# Altium PCB pcb_e2_tp1.PcbDoc
Units mm, origin at the board's own origin, x right, y up, seen from the top; angles counter-clockwise.
Board outline 100.08 x 50.04 mm, 2 copper layers (Top Layer, Bottom Layer); 26 components, 16 nets, 67 pads, 0 vias.
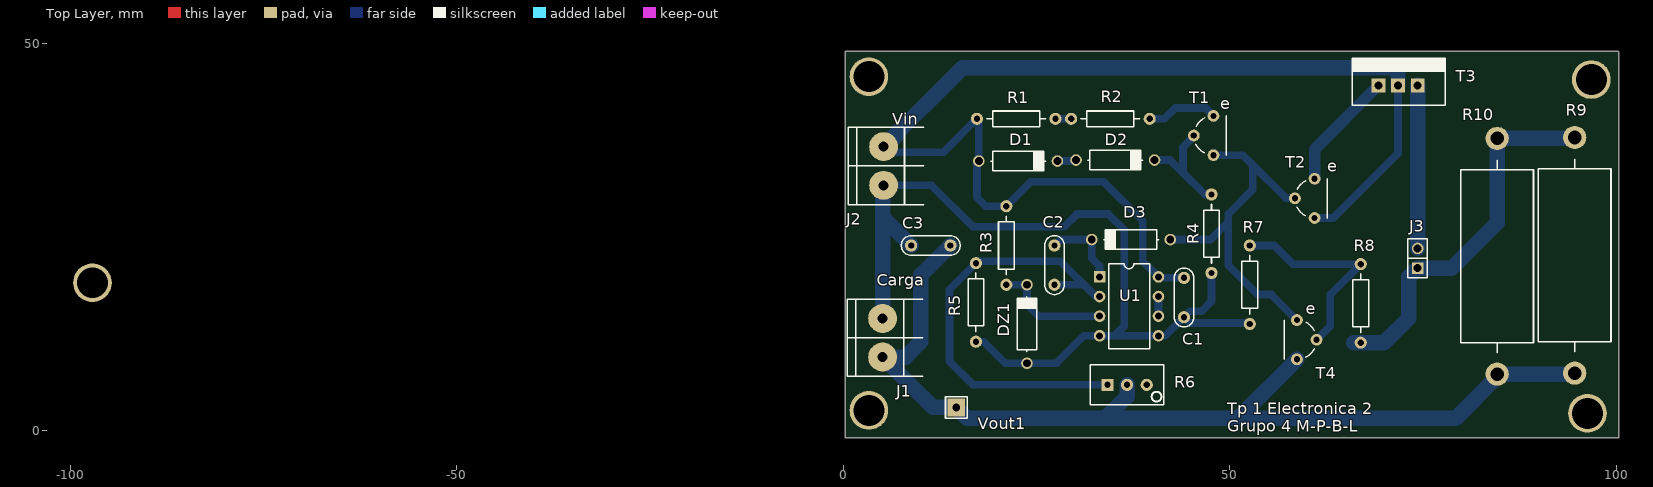
[diagram p0: Top Layer view]
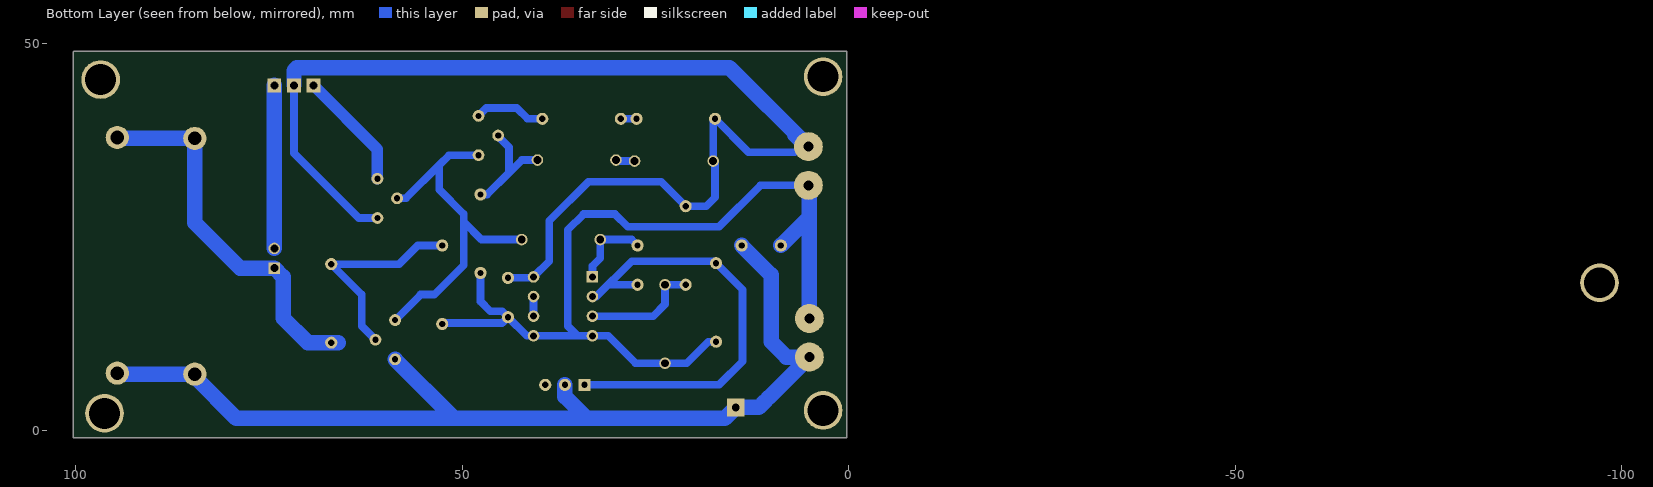
[diagram p1: Bottom Layer view, seen from below]
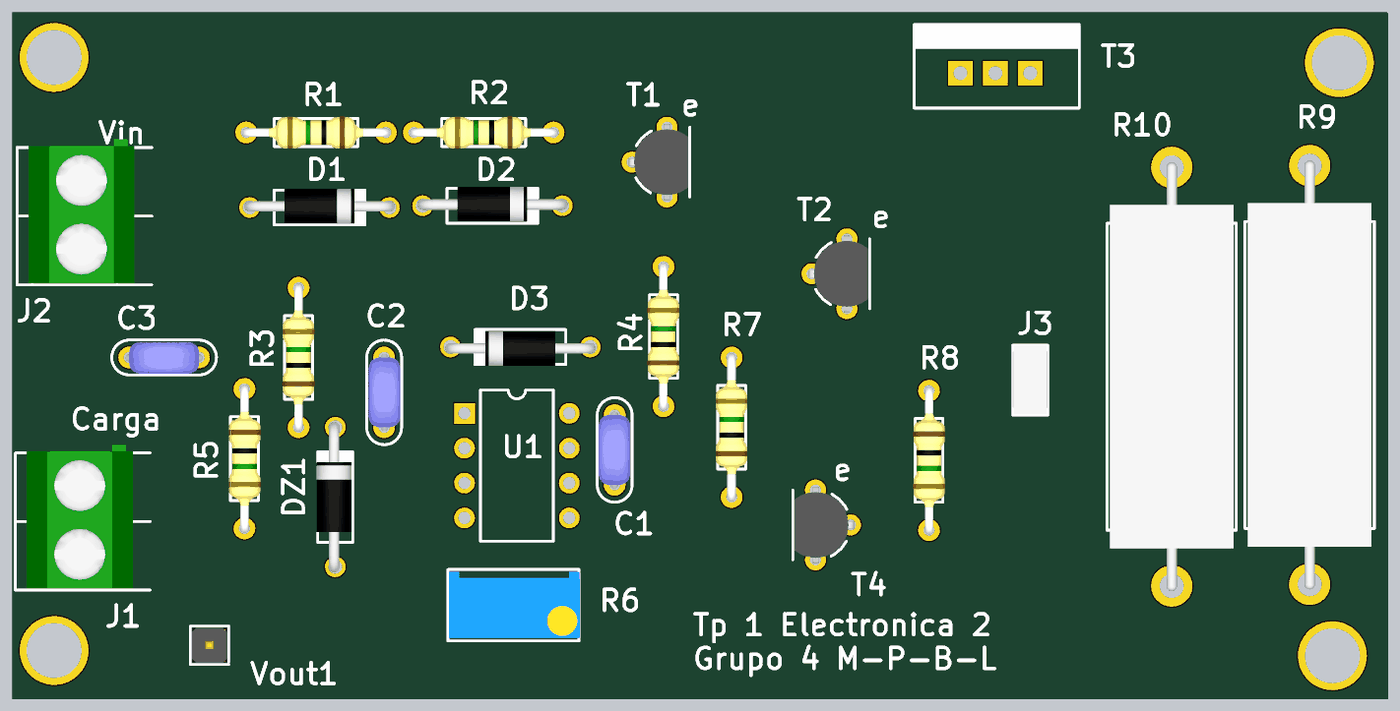
[diagram p2: 3D render of the assembled board from above, using the file's embedded part models]

## Layer stack, top to bottom
Top Solder: solder mask 0.0102, Solder Resist, Dk 3.5
Top Layer: signal copper 0.0356
Dielectric 1: dielectric 0.32, FR-4, Dk 4.8
Bottom Layer: signal copper 0.0356
Bottom Solder: solder mask 0.0102, Solder Resist, Dk 3.5

## Board outline
0.254,-1.016 0.254,49.022 100.216,49.022 100.33,48.908 100.33,-1.016

## Design rules (kind name [scope] priority, off if disabled: settings)
Clearance [All] p1: gap=0.4 ignorepadtopadclearanceinfootprint=FALSE except(0: Arc-Hole Track-Hole SMDPad-Hole THPad-Hole Via-Hole Fill-Hole Poly-Hole Region-Hole Text-Hole)
PolygonConnect [All] p1: connectstyle=Relief reliefconductorwidth=0.254 reliefentries=4 polygonreliefangle="90 Angle" airgapwidth=0.254
RoutingVias [All] p1: holewidth=0.5 width=2 viastyle="Through Hole" minholewidth=0.5 minwidth=1.5 maxholewidth=7 maxwidth=2
SolderMaskExpansion [All] p1: expansion=0.102
Width [All] p1: maxlimit=2 minlimit=1 preferedwidth=1
30 further rules are at their usual default settings.

## Components (designator, comment, footprint, x,y, rotation, side; value= is the part's Value field where it differs from the comment)
C1 "CAP" CAP200 44.069,17.145 r270 top
C2 "CAP" CAP200 27.305,21.336 r90 top
C3 "CAP" CAP200 11.303,23.876 r0 top
D1 "DIODO" DO41 22.606,34.798 r0 top
D2 "DIODO" DO41 35.179,34.925 r0 top
D3 "DIODO" DO41 37.211,24.638 r180 top
DZ1 "DIODO ZENER" DO41 23.749,13.716 r90 top
J1 "Carga" BORNERA2 5.08,11.938 r0 top
J2 "BORNERA 2" BORNERA2 5.207,34.163 r0 top
J3 "M_I" JUMPER2 74.295,22.225 r90 top
R1 "8.2" RES400 27.432,40.259 r180 top
R2 "560" RES400 39.624,40.259 r180 top
R3 "1k" RES400 21.082,18.796 r90 top
R4 "1k" RES400 47.625,20.32 r90 top
R5 "50k" RES400 17.145,21.59 r270 top
R6 "PRESET" "PRESET V" 36.703,5.842 r0 top
R7 "39k" RES400 52.578,13.716 r90 top
R8 "1k" RES400 66.929,21.463 r270 top
R9 "1.2" RES1200 94.615,22.606 r270 top
R10 "1.2" RES1200 84.582,22.479 r270 top
T1 "TRANSISTOR PNP" TO92 46.609,38.1 r270 top
T2 "TRANSISTOR NPN" TO92 59.69,29.972 r270 top
T3 "TRANSISTOR NPN" "TO-220 V" 71.755,44.577 r0 top
T4 "TRANSISTOR NPN" TO92 59.944,11.684 r90 top
U1 "LM358AN" DIP8 36.957,16.002 r270 top
Vout1 "TP" TPTH 14.605,2.921 r90 top

## Footprints (in the part's own frame and the unit in brackets; to place one, negate y for a bottom-side part, rotate by r counter-clockwise, add the part's x,y. Pads: shape width x height; smd on the part's side, far side on the other; paste and mask are expansions set on the pad)
BORNERA2 [mm] "Bornera con Tornillos 5mm separación"
  round 3.75 hole 1.3: 1(0,2.5) 2(0,-2.5)
  silkscreen extent -4.6,-5 5.2,5, body extent -3.76,-4.89 3.94,5.61, height 10
CAP200 [mil]
  round 62 hole 32: 1(-100,0) 2(100,0)
  silkscreen extent -150,-50 150,50, body extent -110,-46 110,44, height 246
DIP8 [mm] "DIP; 8 Leads; Row Spacing 7.62 mm; Pitch 2.54 mm"
  rect 1.5x1.5 hole 0.9: 1(-3.81,-3.81)
  round 1.5 hole 0.9: 2(-1.27,-3.81) 3(1.27,-3.81) 4(3.81,-3.81) 5(3.81,3.81) 6(1.27,3.81) 7(-1.27,3.81) 8(-3.81,3.81)
  silkscreen extent -5.5,-2.65 5.5,2.65
DO41 [mm]
  round 1.5 hole 1.016: 1(-5.08,0) 2(5.08,0)
  silkscreen extent -3.56,-1.27 3.56,1.27, body extent -5.46,-1.19 5.46,1.37, height 2.03
JUMPER2 [mm]
  rect 1.5x1.5 hole 1.016: 1(-1.27,0)
  round 1.5 hole 1.016: 2(1.27,0)
  silkscreen extent -2.54,-1.27 2.54,1.27, body extent -2.46,-1.27 2.54,1.27, height 9.5
"PRESET V" [mil]
  rect 62x62 hole 32: 1(-100,0)
  round 62 hole 32: 2(0,0) 3(100,0)
  silkscreen extent -188,-102 188,102, body extent -185,-95 190,95, height 455
RES400 [mil]
  round 62 hole 32: 1(0,0) 2(400,0)
  silkscreen extent 50,-40 350,40, body extent -12,-45 412,46, height 96
RES1200 [mm]
  round 3 hole 1.75: 1(-15.24,0) 2(15.24,0)
  silkscreen extent -12.45,-4.7 12.45,4.7, body extent -15.62,-4.5 15.61,4.5, height 9.51
TO92 [mil]
  round 60 hole 32: 1(0,-50) 2(100,50) 3(-100,50)
  silkscreen extent -100,-39 100,115, body extent -110,-61 110,110, height 315
"TO-220 V" [mil]
  rect 70x70 hole 40: 1(-100,0) 2(0,0) 3(100,0)
  silkscreen extent -232,-100 240,139, body extent -197,-79 197,118, height 709
TPTH [mm]
  rect 2.3x2.3 hole 1.016: 1(0,0)
  silkscreen extent -1.4,-1.4 1.4,1.4, body extent -1.27,-1.27 1.27,1.27, height 6.04

## Part data
J1: library part "BORNERA 2"
J3: library part JUMPER
R1 R2 R3 R4 R5 R7 R8 R9 R10: library part RES
U1: "Low-Power Dual Operational Amplifier"

## Free pads (board coordinates)
  round 5 hole 4: 13(-97.155,19.05) 13(3.302,2.54) 13(3.302,45.72) 13(96.266,2.159) 13(96.774,45.339)

## Nets (pads, with @x,y where several pads share a name; then routed paths per layer and width w, separated by ;. In a path a pad name is that pad's centre, name@x,y a point inside that pad or via, vN(x,y) a via of type N, cw(c..) or ccw(c..) an arc to the next point about the centre after c; other vN are vias at no path point)
Comp_neg: C2.1 R5.1 R6.1 U1.2 | length 57.4
  Bottom Layer w1: C2.1 30.861,18.796 ; U1.2 32.639,17.272 28.067,21.844 17.399,21.844 R5.1 13.716,18.161 13.716,8.89 16.764,5.842 R6.1
GND: C1.2 C3.1 DZ1.1 J1.1 J2.2 R4.1 R5.2 R7.1 U1.4 U1.5 | length 119.1
  Bottom Layer w1: J2.2 11.39,31.663 16.764,26.289 28.575,26.289 30.226,27.94 34.29,27.94 36.322,25.908 36.322,13.462 35.052,12.192 ; R5.2 18.161,11.43 20.955,8.636 DZ1.1 27.559,8.636 31.115,12.192 U1.4 35.052,12.192 ; R4.1 47.625,16.637 46.355,15.367 44.831,15.367 C1.2 ; R7.1 52.451,13.843 44.831,13.843 C1.2 ; 35.052,12.192 U1.5 41.656,12.192 C1.2
  Bottom Layer w2: J1.1 5.08,27.559 ; J2.2 5.08,31.536 5.08,27.559 ; C3.1 5.08,27.559
Load: C3.2 J1.2 R6.2 R9.2 R10.2 T4.3 Vout1.1 | length 130.8
  Bottom Layer w2: 10.37,4.147 J1.2 8.041,9.438 10.033,11.43 10.033,20.066 C3.2 ; 10.795,3.723 11.597,2.921 Vout1.1 16.002,1.524 33.909,1.524 ; R6.2 36.703,4.318 33.909,1.524 ; T4.3 51.054,1.524 ; R10.2@84.582,6.858 79.248,1.524 51.054,1.524 ; R10.2 94.742,7.239 R9.2@94.869,7.366 ; 33.909,1.524 51.054,1.524
NetC2_2: C2.2 D3.2 U1.1 | length 10.4
  Bottom Layer w1: C2.2 28.067,24.638 D3.2 32.131,22.225 33.147,21.209 U1.1
NetD1_2: D1.2 D2.1 | length 2.3
  Bottom Layer w1: D1.2 D2.1@29.972,34.798
NetD2_2: D2.2 R4.2 T1.1 | length 14.6
  Bottom Layer w1: D2.2 42.291,34.925 43.942,33.274 ; T1.1 45.339,37.973 43.942,36.576 43.942,33.274 ; R4.2 46.736,30.48 43.942,33.274
NetD3_1: D3.1 T1.2 T2.1 T4.2 | length 47.4
  Bottom Layer w1: D3.1 47.498,24.638 49.784,26.924 ; T1.2 51.689,35.56 52.959,34.29 ; T2.1 57.277,29.972 52.959,34.29 ; T4.2 55.372,17.526 53.594,17.526 49.784,21.336 49.784,26.924 ; 49.784,26.924 49.784,27.94 52.959,31.115 52.959,34.29
NetJ3_1: J3.1 R8.2 R9.1 R10.1 | length 49.1
  Bottom Layer w2: 66.04,11.303 69.977,11.303 73.152,14.478 73.152,19.812 J3.1 78.74,20.955 84.582,26.797 R10.1 94.488,37.719 R9.1
NetJ3_2: J3.2 T3.3 | length 21.1
  Bottom Layer w2: J3.2 T3.3
NetR1_1: R1.1 R2.2 | length 2
  Bottom Layer w1: R1.1 R2.2
NetR2_1: R2.1 T1.3 | length 9.3
  Bottom Layer w1: R2.1 41.529,40.259 42.926,41.656 46.863,41.656 T1.3
NetR7_2: R7.2 R8.1 T4.1 | length 27.8
  Bottom Layer w1: R7.2@52.324,23.876 55.753,23.876 58.166,21.463 R8.1 62.992,17.526 62.992,13.462 T4.1
NetT2_3: T2.3 T3.1 | length 15.5
  Bottom Layer w1.5: T2.3 60.96,36.322 T3.1
NetU1_6: U1.6 U1.7 | length 2.5
  Bottom Layer w1: U1.6 U1.7
"Salida zener": DZ1.2 R3.1 U1.3 | length 15.2
  Bottom Layer w1: R3.1 DZ1.2 23.749,16.256 25.273,14.732 U1.3
Vin: C1.1 D1.1 J2.1 R1.2 R3.2 T2.2 T3.2 U1.8 | length 156.9
  Bottom Layer w1: 6.985,35.941 12.954,35.941 R1.2 ; D1.1@17.272,34.671 17.272,30.099 18.415,28.956 R3.2 24.257,32.131 33.655,32.131 38.735,27.051 38.735,21.844 U1.8 40.894,19.685 C1.1 ; D1.1 R1.2@17.526,40.005 ; T2.2 63.373,27.432 71.755,35.814 T3.2
  Bottom Layer w2: 6.985,38.227 5.421,36.663 J2.1 15.41,46.866 71.371,46.866 71.755,46.482 T3.2
pads on no net: R6.3

## Silkscreen, mask and mechanical layers (free items; w line width, h text height)
Top Overlay:
  text "e" at 48.768,41.529 h1.52
  text "Vin" at 6.35,39.497 h1.52
  text "e" at 62.611,33.401 h1.52
  text "Carga" at 4.318,18.669 h1.52
  text "e" at 59.817,14.986 h1.52
  text "Tp 1 Electronica 2 / Grupo 4 M-P-B-L" at 49.657,-0.254 h1.52